# Altium PCB board_One.PcbDoc
Units mm, origin at the board's own origin, x right, y up, seen from the top; angles counter-clockwise.
Board outline 99.66 x 38.1 mm, 2 copper layers (Top Layer, Bottom Layer); 11 components, 10 nets, 21 pads, 0 vias.
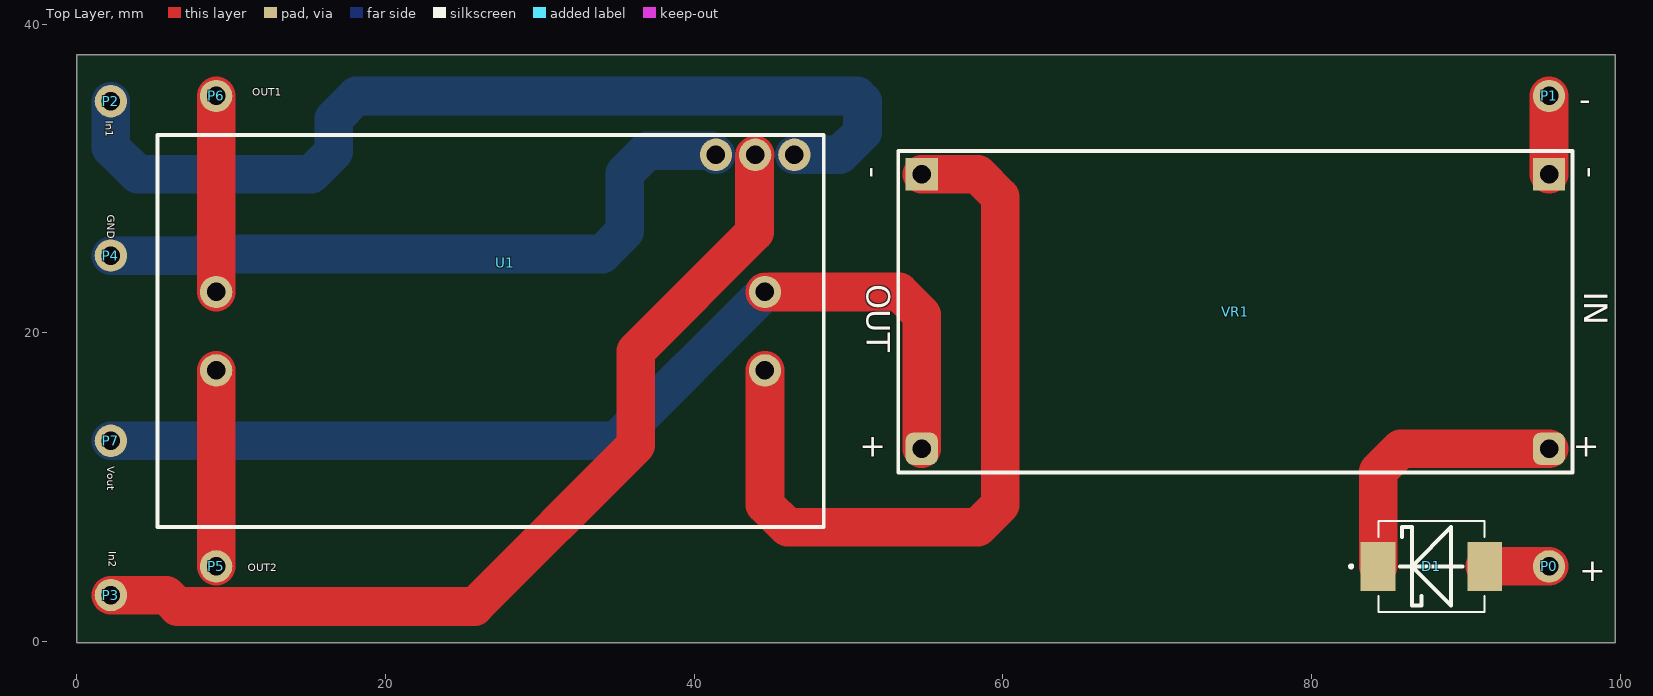
[diagram p0: Top Layer view]
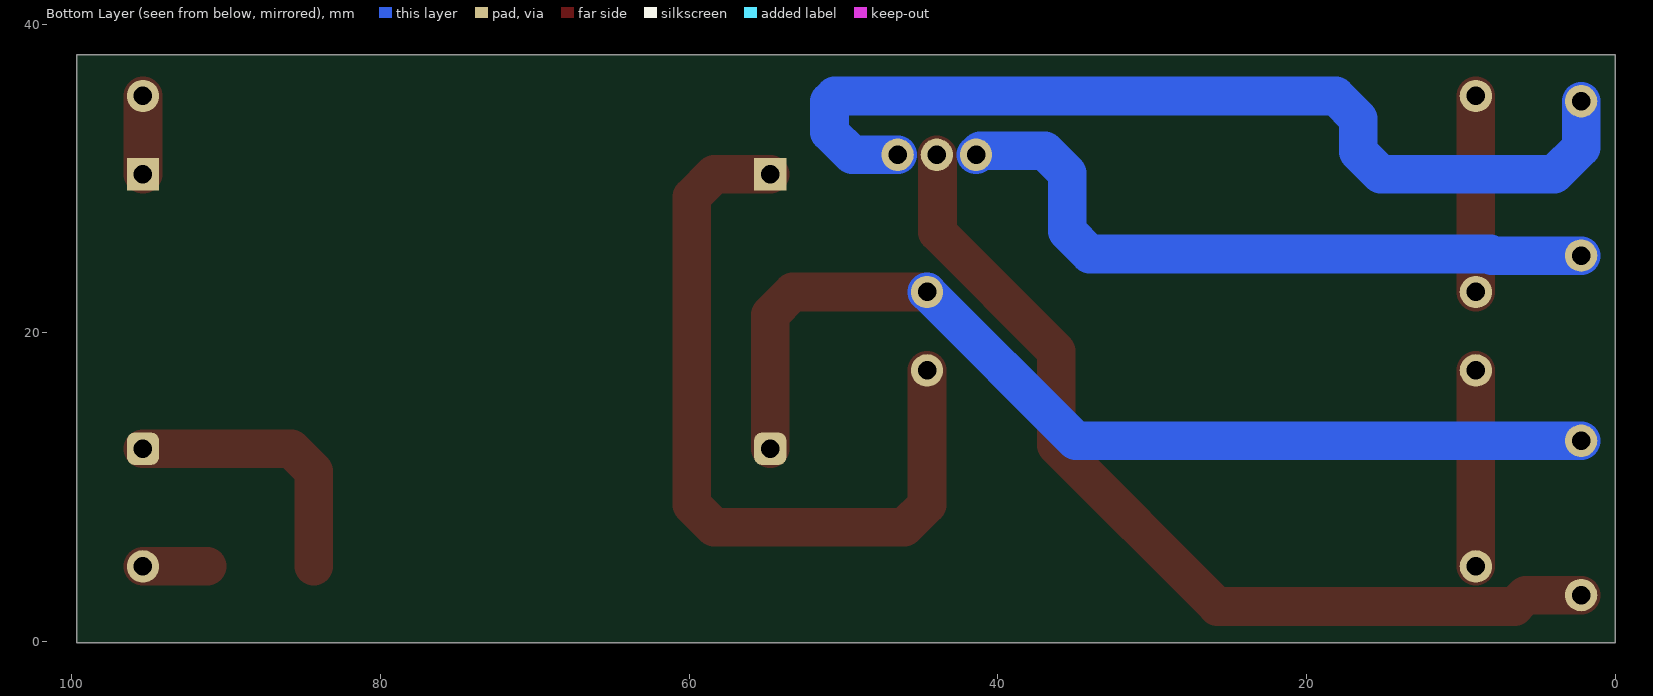
[diagram p1: Bottom Layer view, seen from below]

## Layer stack, top to bottom
Top Solder: solder mask 0.0102, Solder Resist, Dk 3.5
Top Layer: signal copper 0.0356
Dielectric 1: dielectric 0.32, FR-4, Dk 4.8
Bottom Layer: signal copper 0.0356
Bottom Solder: solder mask 0.0102, Solder Resist, Dk 3.5

## Board outline
0,-0.1 99.66,-0.1 99.66,38 0,38

## Design rules (kind name [scope] priority, off if disabled: settings)
AssemblyTestPointUsage [All] p1: isadvanced=TRUE
AssemblyTestpoint [All] p1: isadvanced=TRUE testpointundercomponent=TRUE minsize=1.016 maxsize=2.54 preferedsize=1.524 minholesize=0 maxholesize=1.016 preferedholesize=0.813 testpointgrid=0.025 usegrid=TRUE gridtolerance=0 allowsidetop=TRUE allowsidebottom=TRUE
Clearance Clearance_1 [OnMid vs OnMid] p1: gap=0.1 ignorepadtopadclearanceinfootprint=FALSE sourcerule=37 cellrowname=All cellrowtype=0 cellcolname=All cellcoltype=0 innerlayers=TRUE
Clearance Clearance_2 [(ExistsOnLayer('Top Layer') Or ExistsOnLayer('Bottom Layer')) vs (ExistsOnLayer('Top Layer') Or ExistsOnLayer('Bottom Layer'))] p2: gap=0.1 ignorepadtopadclearanceinfootprint=FALSE sourcerule=37 cellrowname=All cellrowtype=0 cellcolname=All cellcoltype=0 outerlayers=TRUE
Clearance [All] p3: gap=0.254 ignorepadtopadclearanceinfootprint=FALSE ismatrix=TRUE
ComponentClearance [All] p1: isadvanced=TRUE gap=0.254 collisioncheckmode=3 verticalgap=0.254 showdistances=FALSE
FabricationTestPointUsage [All] p1: isadvanced=TRUE valid=0 allowmultiple=FALSE
FabricationTestpoint [All] p1: isadvanced=TRUE side=3 testpointundercomponent=TRUE minsize=1.016 maxsize=2.54 preferedsize=1.524 minholesize=0 maxholesize=1.016 preferedholesize=0.813 testpointgrid=0.025 allowsidetop=TRUE allowsidebottom=TRUE usegrid=TRUE gridtolerance=0
FanoutControl Fanout_BGA [IsBGA] p1: isadvanced=TRUE bgadir=Out bgaviamode=Centered fanoutstyle=Auto fanoutdirection=Alternating viagrid=0.025 // Fanout_BGA (Default Rule)
FanoutControl Fanout_LCC [IsLCC] p2: isadvanced=TRUE bgadir=Out bgaviamode=Centered fanoutstyle=Auto fanoutdirection=Alternating viagrid=0.025 // Fanout_LCC (Default Rule)
FanoutControl Fanout_SOIC [IsSOIC] p3: isadvanced=TRUE bgadir=Out bgaviamode=Centered fanoutstyle=Auto fanoutdirection=Alternating viagrid=0.025 // Fanout_SOIC (Default Rule)
FanoutControl Fanout_Small [(CompPinCount < 5)] p4: isadvanced=TRUE bgadir=Out bgaviamode=Centered fanoutstyle=Auto fanoutdirection=OutThenIn viagrid=0.025 // Fanout_Small (Default Rule)
FanoutControl Fanout_Default [All] p5: isadvanced=TRUE bgadir=Out bgaviamode=Centered fanoutstyle=Auto fanoutdirection=Alternating viagrid=0.025 // Fanout_Default (Default Rule)
Height [All] p1: isadvanced=TRUE minheight=0 maxheight=25.4 prefheight=12.7
HoleSize [All] p1: isadvanced=TRUE absolutevalues=TRUE maxlimit=2.54 minlimit=0.025 maxpercent=80.000 minpercent=20.000
HoleToHoleClearance [All] p1: isadvanced=TRUE gap=0.254 allowstackedmicrovias=TRUE
LayerPairs [All] p1: isadvanced=TRUE enforce=TRUE
MinimumSolderMaskSliver [All] p1: isadvanced=TRUE minsoldermaskwidth=0.254
NetAntennae [All] p1: isadvanced=TRUE netantennaetolerance=0
PasteMaskExpansion [All] p1: isadvanced=TRUE expansion=0
PlaneClearance [All] p1: isadvanced=TRUE clearance=0.508
PlaneConnect [All] p1: isadvanced=TRUE planeconnectstyle=Relief reliefexpansion=0.508 reliefentries=4 reliefconductorwidth=0.254 reliefairgap=0.254
PolygonConnect [All] p1: connectstyle=Relief reliefconductorwidth=0.254 reliefentries=4 polygonreliefangle="90 Angle" airgapwidth=0.254
RoutingCorners [All] p1: isadvanced=TRUE cornerstyle=45-Degree minsetback=2.54 maxsetback=2.54
RoutingPriority [All] p1: isadvanced=TRUE routingpriority=0
RoutingVias [All] p1: holewidth=0.711 width=1.27 viastyle="Through Hole" minholewidth=0.711 minwidth=1.27 maxholewidth=0.711 maxwidth=1.27
ShortCircuit [All] p1: isadvanced=TRUE allowed=FALSE
SilkToSilkClearance [All] p1: isadvanced=TRUE silktosilkclearance=0.254
SilkToSolderMaskClearance [IsPad] p1: isadvanced=TRUE minsilkscreentomaskgap=0.254 clearancetoexposedcopper=TRUE
SolderMaskExpansion [All] p1: isadvanced=TRUE expansion=0.102 istentingtop=FALSE
UnRoutedNet [All] p1: isadvanced=TRUE
UnpouredPolygon [All] p1: isadvanced=TRUE
Width MaxMinWidth_1 [All] p1: isadvanced=TRUE maxlimit=2.5 minlimit=2.5 preferedwidth=2.5 minimp=50.000000 maximp=50.000000 favimp=50.000000
Width [All] p2 off: maxlimit=0.254 minlimit=0.254 preferedwidth=0.254
4 further rules are at their usual default settings.

## Classes and differential pairs
component class board_One: D1 P0 P1 P2 P3 P4 P5 P6 P7 VR1

## Components (designator, comment, footprint, x,y, rotation, side; value= is the part's Value field where it differs from the comment)
D1 "SS34" DIOM7959X265N 87.76,4.86 r0 top
P0 "PIN_1" PCB_Pin_1 95.38,4.86 r0 top
P1 "PIN_1" PCB_Pin_1 95.38,35.34 r0 top
P2 "PIN_1" PCB_Pin_1 2.2,35 r0 top
P3 "PIN_1" PCB_Pin_1 2.2,3 r0 top
P4 "PIN_1" PCB_Pin_1 2.2,25 r0 top
P5 "PIN_1" PCB_Pin_1 9.02,4.86 r0 top
P6 "PIN_1" PCB_Pin_1 9.02,35.34 r0 top
P7 "PIN_1" PCB_Pin_1 2.2,13 r0 top
U1 "XY-MC10" PCB_XY-MC10 44.58,22.64 r180 top
VR1 "LM2596" "DC-DC Step-Down Footprint" 97.92,32.8 r180 top

## Footprints (in the part's own frame and the unit in brackets; to place one, negate y for a bottom-side part, rotate by r counter-clockwise, add the part's x,y. Pads: shape width x height; smd on the part's side, far side on the other; paste and mask are expansions set on the pad)
"DC-DC Step-Down Footprint" [mm]
  rect 2.1x2.1 hole 1.2: 0(2.54,2.54) 3(43.18,2.54)
  rrect50% 2.1x2.1 hole 1.2: 1(2.54,20.32) 2(43.18,20.32)
  silkscreen extent 1.02,1.02 44.7,21.84
DIOM7959X265N [mm]
  rect 2.25x3.18 smd: A(3.455,0) C(-3.455,0)
  silkscreen extent -5.3,-2.95 3.44,2.95, body extent -3.98,-2.95 3.98,2.95, height 2.65
PCB_Pin_1 [mm]
  round 2.1 hole 1.2: 0(0,0)
  body extent -1,-1 1,1, height 4.55
PCB_XY-MC10 [mm]
  round 2.1 hole 1.2: 0(0,5.08) 1(0,0) 2(-1.905,-8.89) 3(0.635,-8.89) 4(3.175,-8.89) 5(35.56,0) 6(35.56,5.08)
  silkscreen extent -3.81,-10.16 39.37,15.24

## Part data
D1: library part Diode_SS34, "SS34 - діод Шоттки", Package="SMC-2 ON Semiconductor", Check_prices=https://www.snapeda.com/parts/SS34/Onsemi/view-part/?ref=eda, MF=onsemi, MP=SS34, SnapEDA_Link=https://www.snapeda.com/parts/SS34/Onsemi/view-part/?ref=snap
VR1: library part "DC-DC Step-Down", "DC-DC конвертер знижуючий 4.5...40В на 1.5...35В на LM2596"

## Nets (pads, with @x,y where several pads share a name; then routed paths per layer and width w, separated by ;. In a path a pad name is that pad's centre, name@x,y a point inside that pad or via, vN(x,y) a via of type N, cw(c..) or ccw(c..) an arc to the next point about the centre after c; other vN are vias at no path point)
NetD1_A: D1.A P0.0 | length 4.2
  Top Layer w2.5: D1.A P0.0
NetD1_C: D1.C VR1.1 | length 17.8
  Top Layer w2.5: D1.C 84.305,11.016 85.769,12.48 VR1.1
NetP1_0: P1.0 VR1.0 | length 5.1
  Top Layer w2.5: VR1.0 P1.0
NetP2_0: P2.0 U1.2 | length 63
  Bottom Layer w2.5: P2.0 2.2,32 3.94,30.26 15.176,30.26 16.64,31.724 16.64,33.876 18.104,35.34 50.56,35.34 50.9,35 50.9,32.994 49.436,31.53 U1.2
NetP3_0: P3.0 U1.3 | length 60.7
  Top Layer w2.5: P3.0 5.778,3 6.518,2.26 25.76,2.26 36.2,12.7 36.2,18.8 43.9,26.5 43.9,31.485 U1.3
NetP4_0: P4.0 U1.4 | length 44.3
  Bottom Layer w2.5: P4.0 7.986,25 8.086,25.1 34.036,25.1 35.5,26.564 35.5,30.336 36.964,31.8 41.135,31.8 U1.4
NetP5_0: P5.0 U1.6 | length 12.7
  Top Layer w2.5: P5.0 U1.6
NetP6_0: P6.0 U1.5 | length 12.7
  Top Layer w2.5: U1.5 P6.0
NetP7_0: P7.0 U1.1 VR1.2 | length 65.8
  Top Layer w2.5: U1.1 53.276,22.64 54.74,21.176 VR1.2
  Bottom Layer w2.5: P7.0 34.94,13 U1.1
NetU1_0: U1.0 VR1.3 | length 50.8
  Top Layer w2.5: U1.0 44.58,8.864 46.044,7.4 58.356,7.4 59.82,8.864 59.82,28.796 58.356,30.26 VR1.3

## Silkscreen, mask and mechanical layers (free items; w line width, h text height)
Top Overlay:
  text "OUT1" at 11.354,35.354 h0.5
  text "-" at 97.354,34.392 h1.52
  text "In1" at 1.854,33.746 h0.5 r270
  text "GND" at 1.954,27.646 h0.5 r270
  text "Vout" at 1.954,11.346 h0.5 r270
  text "In2" at 2.054,5.846 h0.5 r270
  text "OUT2" at 11.054,4.554 h0.5
  text "+" at 97.354,3.9 h1.52

## Text inside footprints (layer, text, board x,y; h text height)
VR1: Top Overlay "OUT" at 51.184,23.148 h1.52 r270; Top Overlay "IN" at 97.666,22.64 h1.52 r270; Top Overlay "+" at 52.454,13.242 h1.52 r180; Top Overlay "-" at 50.93,30.768 h1.52 r270; Top Overlay "-" at 97.412,30.768 h1.52 r270; Top Overlay "+" at 98.682,13.242 h1.52 r180